# Altium PCB MainBoard.PcbDoc
Units mil, origin at the board's own origin, x right, y up, seen from the top; angles counter-clockwise.
Board outline 3600 x 2800 mil, 2 copper layers (Top Layer, Bottom Layer); 66 components, 52 nets, 264 pads, 84 vias.
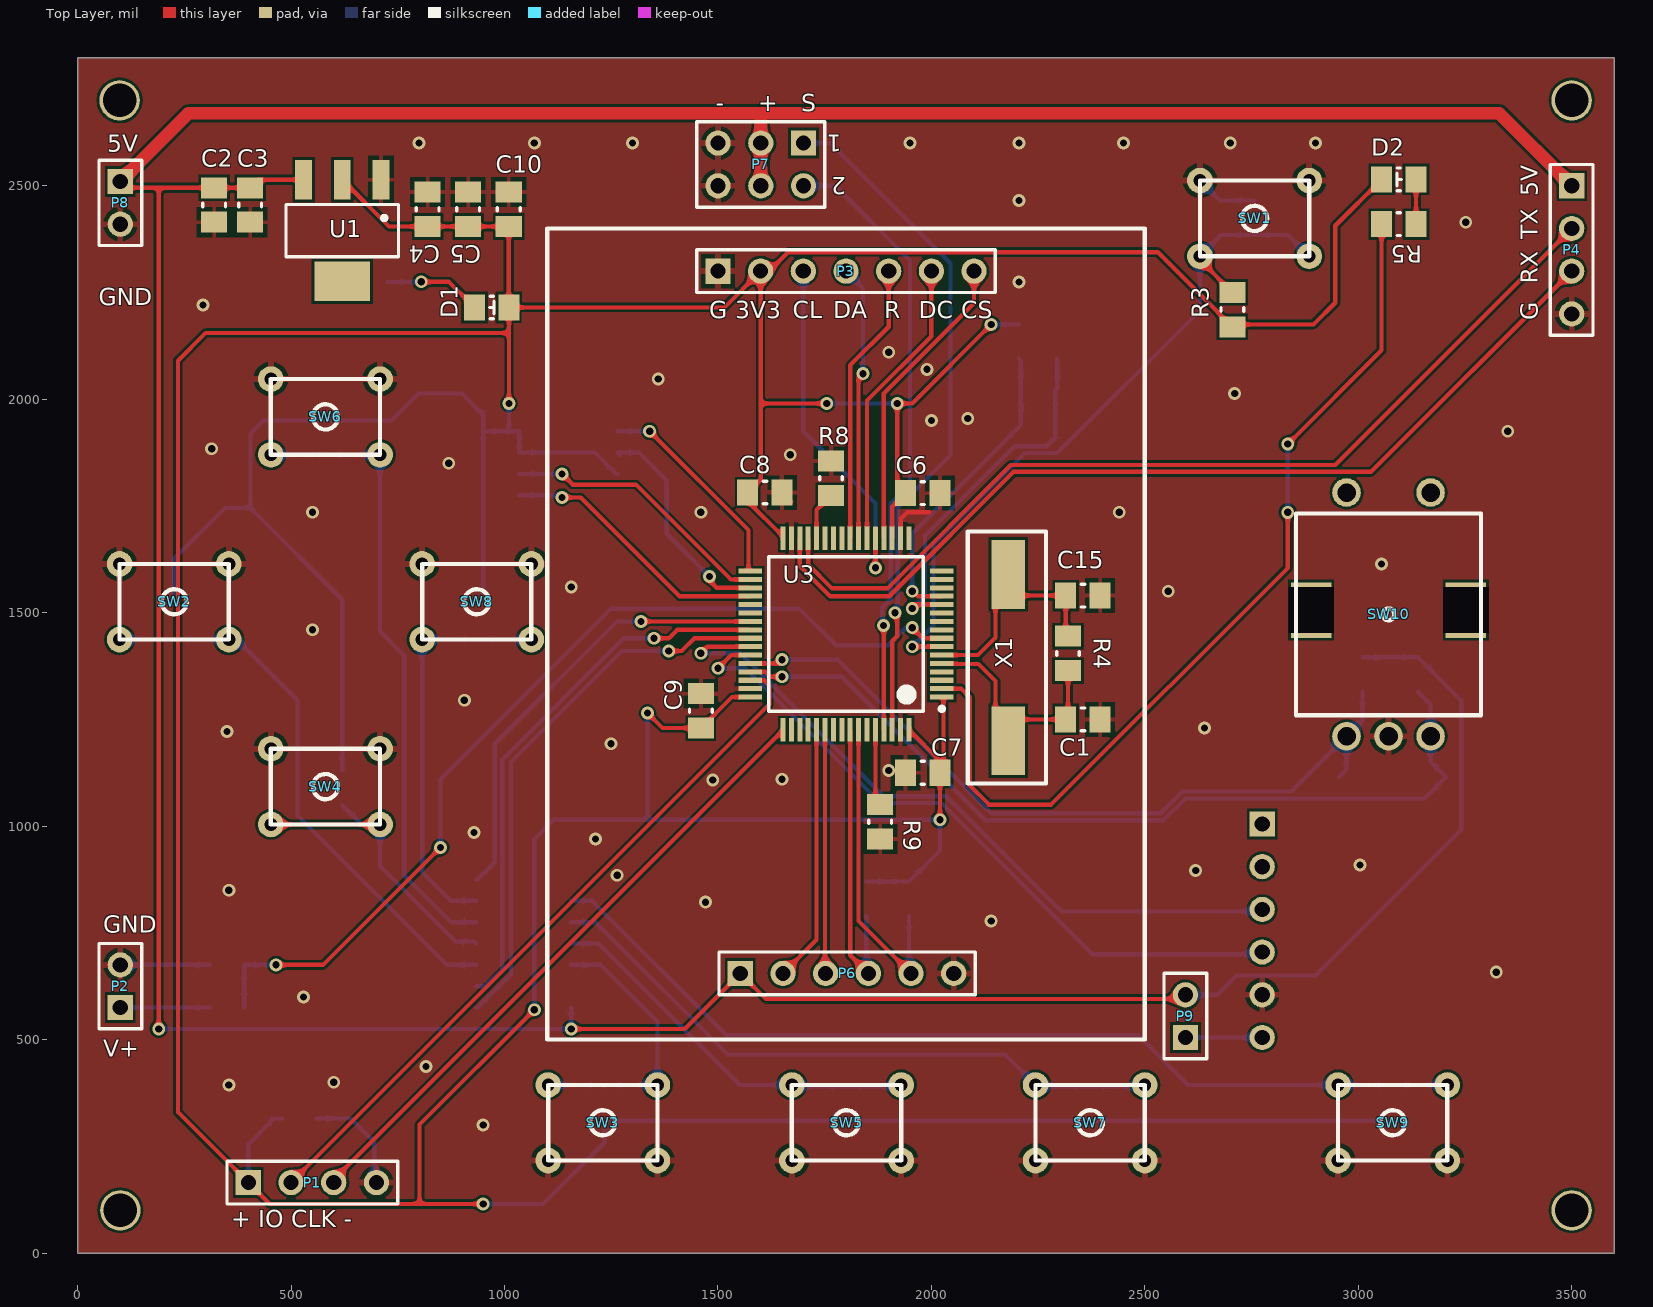
[diagram p0: Top Layer view]
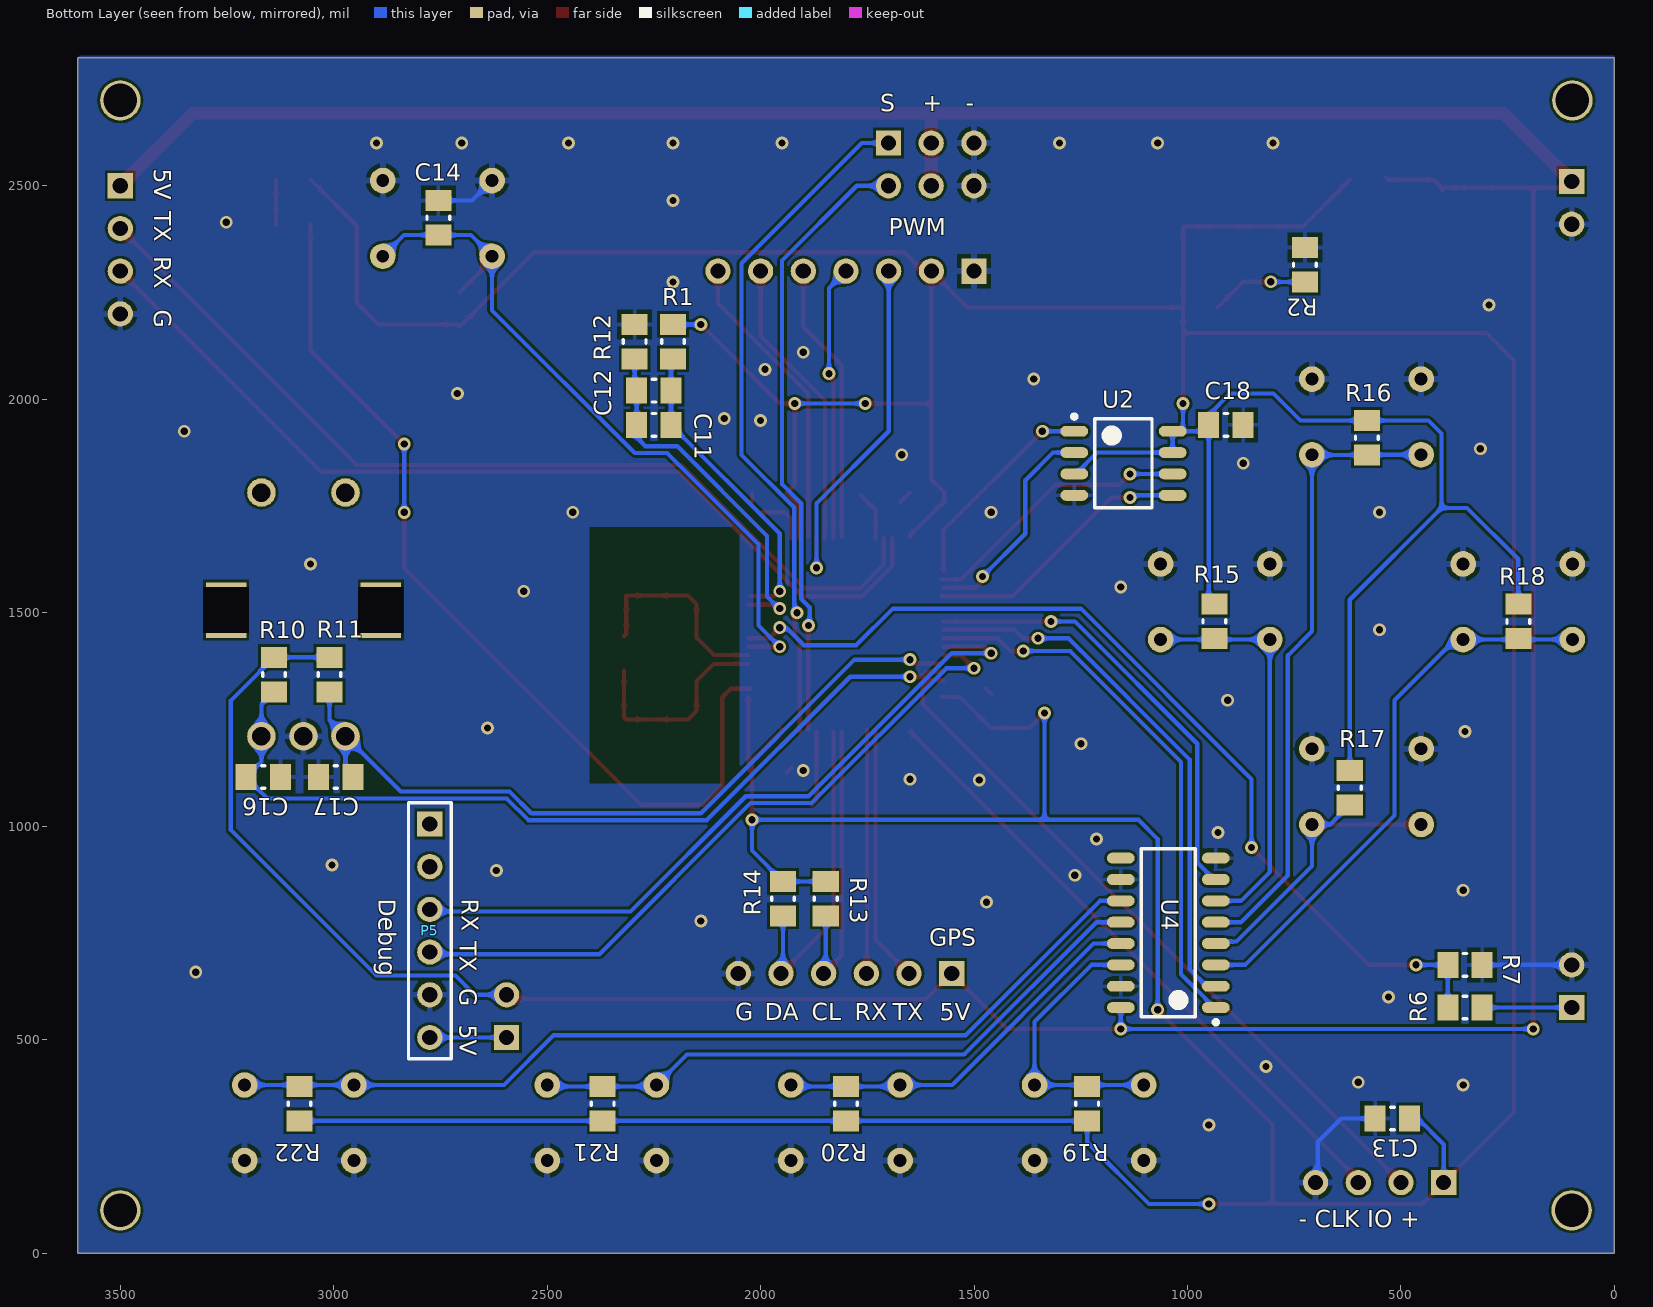
[diagram p1: Bottom Layer view, seen from below]

## Layer stack, top to bottom
Top Solder: solder mask 0.4, Solder Resist, Dk 3.5
Top Layer: signal copper 1.4
Dielectric 1: dielectric 12.6, FR-4, Dk 4.8
Bottom Layer: signal copper 1.4
Bottom Solder: solder mask 0.4, Solder Resist, Dk 3.5

## Board outline
0,0 0,2800 3600,2800 3600,0

## Design rules (kind name [scope] priority, off if disabled: settings)
Clearance [All] p1: gap=6 ignorepadtopadclearanceinfootprint=TRUE except(0: Arc-Hole Track-Hole SMDPad-Hole THPad-Hole Via-Hole Fill-Hole Poly-Hole Region-Hole Text-Hole; 10: Arc-THPad Arc-Via Arc-Text Track-THPad Track-Via Track-Text SMDPad-THPad SMDPad-Via SMDPad-Text THPad-THPad THPad-Via THPad-Text Via-Via Via-Text Fill-Text Poly-Text Region-Text Text-Text)
PolygonConnect [All] p1: thpad.connectstyle=Relief thpad.reliefconductorwidth=15 thpad.reliefentries=4 thpad.polygonreliefangle="90 Angle" thpad.airgapwidth=10 smdpad.connectstyle=Relief smdpad.reliefconductorwidth=10 smdpad.reliefentries=4 smdpad.polygonreliefangle="90 Angle" smdpad.airgapwidth=10 via.connectstyle=Direct via.reliefconductorwidth=10 via.reliefentries=4 via.polygonreliefangle="90 Angle" via.airgapwidth=10
RoutingVias [All] p1: holewidth=17 width=30 viastyle="Through Hole" minholewidth=17 minwidth=30 maxholewidth=28 maxwidth=50
SolderMaskExpansion [All] p1: expansion=4
Width [All] p1: maxlimit=30 minlimit=10 preferedwidth=10 minimp=50.000000 maximp=50.000000 favimp=50.000000
30 further rules are at their usual default settings.

## Components (designator, comment, footprint, x,y, rotation, side; value= is the part's Value field where it differs from the comment)
C1 "22p" 0805 2355,1250 r0 top
C2 "106" 0805 320,2455 r90 top
C3 "104" 0805 404.33,2455 r90 top
C4 "104" 0805 820,2445 r270 top
C5 "106" 0805 915,2445 r270 top
C6 "104" 0805 1980,1780 r180 top
C7 "104" 0805 1980,1125 r0 top
C8 "104" 0805 1610,1781.5 r180 top
C9 "104" 0805 1460,1270 r270 top
C10 "104" 0805 1010,2445 r270 top
C11 "104" 0805 2250,1940 r180 bottom
C12 "106" 0805 2250,2020 r180 bottom
C13 "104" 0805 520,315 r180 bottom
C14 "105" 0805 2755,2425 r270 bottom
C15 "22p" 0805 2355,1540 r0 top
C16 "104" 0805 3165,1115 r0 bottom
C17 "104" 0805 2995,1115 r0 bottom
C18 "104" 0805 910,1940 r180 bottom
D1 "LED" 0805 970,2215 r180 top
D2 "LED" 0805 3095,2515 r0 top
P1 "SWD" HDR1X4 400,165 r0 top
P2 "BAT Power" HDR1X2 100,575 r90 top
P3 "OLED" HDR1X7 1500,2300 r0 top
P4 "Telem" HDR1X4 3500,2500 r270 top
P5 "Debug" HDR1X6 2775,1005 r270 bottom
P6 "GPS" HDR1X6 1552.36,655 r0 top
P7 "PWM" HDR2X3 1700.35,2600 r180 top
P8 "Header 2" HDR1X2 100,2510 r270 top
P9 "Header 2" HDR1X2 2595,505 r90 top
R1 "0R" 0805 2205.35,2135 r90 bottom
R2 "510" 0805 725,2315 r90 bottom
R3 "10k" 0805 2705,2210 r90 top
R4 "1M" 0805 2320,1404.65 r270 top
R5 "510" 0805 3095,2410 r180 top
R6 "5k1" 0805 350,575 r180 bottom
R7 "1k" 0805 350,675 r0 bottom
R8 "10k" 0805 1765,1815 r270 top
R9 "10k" 0805 1880,1010 r270 top
R10 "10k" 0805 3140,1355 r90 bottom
R11 "10k" 0805 3010,1355 r270 bottom
R12 "0R" 0805 2295,2135 r90 bottom
R13 "2k2" 0805 1847.42,830 r270 bottom
R14 "2k2" 0805 1947.64,830 r270 bottom
R15 "10k" 0805 937.12,1480 r90 bottom
R16 "10k" 0805 580,1910 r90 bottom
R17 "10k" 0805 620,1090 r90 bottom
R18 "10k" 0805 225,1479.53 r90 bottom
R19 "10k" 0805 1235,350 r270 bottom
R20 "10k" 0805 1800,350 r270 bottom
R21 "10k" 0805 2370,350 r270 bottom
R22 "10k" 0805 3080,350 r270 bottom
SW1 "" Btn 2885,2335 r180 top
SW2 "" Btn 98.43,1614.17 r0 top
SW3 "" Btn 1102.36,393.7 r0 top
SW4 "" Btn 452.76,1181.1 r0 top
SW5 "" Btn 1673.23,393.7 r0 top
SW6 "" Btn 452.76,2047.24 r0 top
SW7 "" Btn 2244.09,393.7 r0 top
SW8 "" Btn 807.09,1614.17 r0 top
SW9 "" Btn 2952.76,393.7 r0 top
SW10 "EC11" EC11 2972.44,1781.5 r0 top
U1 "AMS1117-3.3" SOT223 620,2395 r270 top
U2 "MB85RS16" SOP8 1150,1850 r180 bottom
U3 "STM32F103R" LQFP64-M 1800,1450 r180 top
U4 "74LS165" SOP16 1045,750 r0 bottom
X1 "8M" 49SMD 2180,1395 r270 top

## Footprints (in the part's own frame and the unit in brackets; to place one, negate y for a bottom-side part, rotate by r counter-clockwise, add the part's x,y. Pads: shape width x height; smd on the part's side, far side on the other; paste and mask are expansions set on the pad)
49SMD [mm] "Chip Capacitor, 2-Leads, Body 12.65x4.50mm, IPC High Density"
  rect 4.1x2 smd: 1(-4.95,0) 2(4.95,0)
  silkscreen extent -7.5,-2.4 7.5,2.25
0805 [mm]
  rect 1.25x1.55 smd: 1(-1.025,0) 2(1.025,0)
  silkscreen extent -0.1,-0.67 0.1,0.67
Btn [mil]
  round 60 hole 30: 1(0,0) 1(255.91,0) 2(0,-177.17) 2(255.91,-177.17)
  silkscreen extent 0,-177 256,0
EC11 [mm]
  round 1.7 hole 1.1: 1(5,0) 2(0,0) 3(0,-14.5) 4(2.5,-14.5) 5(5,-14.5)
  rect 2.4x3.3 hole 2.7 square: ""(-2.1,-7) ""(7.1,-7)
  silkscreen extent -3,-13.25 8,-1.25
HDR1X2 [mm] "Connector; Header; 2 Position"
  rect 1.5x1.5 hole 0.9: 1(0,0)
  round 1.5 hole 0.9: 2(2.54,0)
  silkscreen extent -1.27,-1.27 3.81,1.27
HDR1X4 [mm] "Connector; Header; 4 Position"
  rect 1.5x1.5 hole 0.9: 1(0,0)
  round 1.5 hole 0.9: 2(2.54,0) 3(5.08,0) 4(7.62,0)
  silkscreen extent -1.27,-1.27 8.89,1.27
HDR1X6 [mm] "Connector; Header; 6 Position"
  rect 1.5x1.5 hole 0.9: 1(0,0)
  round 1.5 hole 0.9: 2(2.54,0) 3(5.08,0) 4(7.62,0) 5(10.16,0) 6(12.7,0)
  silkscreen extent -1.27,-1.27 13.97,1.27
HDR1X7 [mm] "Connector; Header; 7 Position"
  rect 1.5x1.5 hole 0.9: 1(0,0)
  round 1.5 hole 0.9: 2(2.54,0) 3(5.08,0) 4(7.62,0) 5(10.16,0) 6(12.7,0) 7(15.24,0)
  silkscreen extent -1.27,-1.27 16.51,1.27
HDR2X3 [mm] "Connector; Header; 3x2 Position"
  rect 1.5x1.5 hole 0.9: 1(0,0)
  round 1.5 hole 0.9: 2(0,2.54) 3(2.54,0) 4(2.54,2.54) 5(5.08,0) 6(5.08,2.54)
  silkscreen extent -1.27,-1.27 6.35,3.81
LQFP64-M [mm] "TSQFP, 64-Leads, Body 10.00x10.00mm, Pitch 0.50mm, IPC Medium Density"
  rect 1.4x0.3 smd: 1(-5.7,3.75) 2(-5.7,3.25) 3(-5.7,2.75) 4(-5.7,2.25) 5(-5.7,1.75) 6(-5.7,1.25) 7(-5.7,0.75) 8(-5.7,0.25) 9(-5.7,-0.25) 10(-5.7,-0.75) 11(-5.7,-1.25) 12(-5.7,-1.75) 13(-5.7,-2.25) 14(-5.7,-2.75) 15(-5.7,-3.25) 16(-5.7,-3.75) 33(5.7,-3.75) 34(5.7,-3.25) 35(5.7,-2.75) 36(5.7,-2.25) 37(5.7,-1.75) 38(5.7,-1.25) 39(5.7,-0.75) 40(5.7,-0.25) 41(5.7,0.25) 42(5.7,0.75) 43(5.7,1.25) 44(5.7,1.75) 45(5.7,2.25) 46(5.7,2.75) 47(5.7,3.25) 48(5.7,3.75)
  rect 0.3x1.4 smd: 17(-3.75,-5.7) 18(-3.25,-5.7) 19(-2.75,-5.7) 20(-2.25,-5.7) 21(-1.75,-5.7) 22(-1.25,-5.7) 23(-0.75,-5.7) 24(-0.25,-5.7) 25(0.25,-5.7) 26(0.75,-5.7) 27(1.25,-5.7) 28(1.75,-5.7) 29(2.25,-5.7) 30(2.75,-5.7) 31(3.25,-5.7) 32(3.75,-5.7) 49(3.75,5.7) 50(3.25,5.7) 51(2.75,5.7) 52(2.25,5.7) 53(1.75,5.7) 54(1.25,5.7) 55(0.75,5.7) 56(0.25,5.7) 57(-0.25,5.7) 58(-0.75,5.7) 59(-1.25,5.7) 60(-1.75,5.7) 61(-2.25,5.7) 62(-2.75,5.7) 63(-3.25,5.7) 64(-3.75,5.7)
  silkscreen extent -5.82,-4.6 4.6,4.6
SOP8 [mm]
  oval 1.65x0.65 smd: 1(-2.925,1.905) 2(-2.925,0.635) 3(-2.925,-0.635) 4(-2.925,-1.905) 5(2.925,-1.905) 6(2.925,-0.635) 7(2.925,0.635) 8(2.925,1.905)
  silkscreen extent -3.05,-2.65 1.7,2.9
SOP16 [mm] "SOP, 16-Leads, Body 9.90x3.91mm, Pitch 1.27mm, IPC Low Density"
  oval 1.65x0.65 smd: 1(-2.825,4.445) 2(-2.825,3.175) 3(-2.825,1.905) 4(-2.825,0.635) 5(-2.825,-0.635) 6(-2.825,-1.905) 7(-2.825,-3.175) 8(-2.825,-4.445) 9(2.825,-4.445) 10(2.825,-3.175) 11(2.825,-1.905) 12(2.825,-0.635) 13(2.825,0.635) 14(2.825,1.905) 15(2.825,3.175) 16(2.825,4.445)
  silkscreen extent -2.95,-5 1.6,5.44
SOT223 [mm] "SOT223, 4-Leads, Body 6.50x7.00mm (avg), Pitch 2.30mm, IPC Low Density"
  rect 2.35x1 smd: 1(-3.025,2.3) 2(-3.025,0) 3(-3.025,-2.3)
  rect 2.35x3.3 smd: 4(3.025,0)
  silkscreen extent -1.55,-3.35 1.55,3.35

## Part data
C1 C2 C3 C4 C5 C6 C7 C8 C9 C10 C11 C12 C13 C14 C15 C16 C17 C18: library part Cap
P1 P4: library part "Header 4", "Header, 4-Pin", LatestRevisionDate=17-Jul-2002, LatestRevisionNote="Re-released for DXP Platform.", Publisher="Altium Limited"
P2: library part "Header 2", "Header, 2-Pin", LatestRevisionDate=17-Jul-2002, LatestRevisionNote="Re-released for DXP Platform.", Publisher="Altium Limited"
P3: library part "Header 7", "Header, 7-Pin", LatestRevisionDate=17-Jul-2002, LatestRevisionNote="Re-released for DXP Platform.", Publisher="Altium Limited"
P5 P6: library part "Header 6", "Header, 6-Pin", LatestRevisionDate=17-Jul-2002, LatestRevisionNote="Re-released for DXP Platform.", Publisher="Altium Limited"
P7: library part "Header 3X2", "Header, 3-Pin, Dual row", LatestRevisionDate=17-Jul-2002, LatestRevisionNote="Re-released for DXP Platform.", Publisher="Altium Limited"
P8 P9: "Header, 2-Pin", LatestRevisionDate=17-Jul-2002, LatestRevisionNote="Re-released for DXP Platform.", Publisher="Altium Limited"
R1 R2 R3 R4 R5 R6 R7 R8 R9 R10 R11 R12 R13 R14 R15 R16 R17 R18 R19 R20 R21 R22: library part Res
SW1 SW2 SW3 SW4 SW5 SW6 SW7 SW8 SW9: library part Btn
X1: library part XTAL

## Free pads (board coordinates)
  round 94.49 hole 78.74: ""(98.43,2700) ""(100,100) ""(3500,100) ""(3500,2700)

## Via types
v1: diameter 30, hole 17, Top Layer to Bottom Layer, 84 vias

## Nets (pads, with @x,y where several pads share a name; then routed paths per layer and width w, separated by ;. In a path a pad name is that pad's centre, name@x,y a point inside that pad or via, vN(x,y) a via of type N, cw(c..) or ccw(c..) an arc to the next point about the centre after c; other vN are vias at no path point)
3V3: C4.2 C5.2 C6.2 C7.2 C8.2 C9.2 C10.2 C13.2 C18.1 D1.1 D2.1 P1.1 P3.2 R1.2 R3.1 R13.1 R14.1 R15.2 R16.2 R17.2 R18.2 R19.2 R20.2 R21.2 R22.2 U1.2 U2.3 U2.7 U2.8 U3.1 U3.19 U3.32 U3.48 U3.64 | length 16642.1
  Top Layer w10: U1.2 729.45,2404.65 C4.2 C5.2 C10.2 1010,2215.35 D1.1 ; v1(950,115) 801,115 ; v1(1010.35,1990) 1010.35,2155 ; v1(1070,570) 801,301 801,115 ; v1(1335,1265) 1370.35,1229.65 C9.2 1532.72,1302.36 U3.48 ; U3.32@1652.36,1678.35 1569.65,1761.06 C8.2 1600,1811.85 1600,1990 ; v1(1755,1990) 1600,1990 ; U3.19 1908.27,1748.62 C6.2 1920,1799.65 v1(1920,1990) 1955,1990 v1(2140,2175) ; U3.64 2020.35,1152.87 C7.2 ; v1(2020,1015) 2020,1124.65 C7.2 ; U3.1@2028.35,1302.36 2028.35,1132.99 C7.2 ; D2.1 2946,2406.35 2946,2226 2895,2175 2710.35,2175 R3.1 2530.12,2344.53 1664.91,2344.53 1620.38,2300 P3.2 ; 801,115 450,115 P1.1 235,330 235,2090 300,2155 1010.35,2155 ; 1010.35,2155 D1.1 ; D1.1 1515,2215 P3.2 ; 1600,1990 P3.2
  Bottom Layer w10: R18.2 225,1625 345.35,1745.35 405,1745.35 ; P1.1 400,255 460,315 C13.2 ; R17.2 620,1530.35 405,1745.35 ; R15.2 950.35,1533.59 C18.1@950.35,1926 ; v1(950,115) 1090.35,115 1235,259.65 R19.2 R20.2 R21.2 R22.2 ; v1(1010.35,1990) U2.8@1010.35,1925 ; v1(1070,570) 1070,970 1115,1015 1335,1015 ; U2.3 1261.82,1825 1211.82,1875 U2.7 U2.8 U2.8@1010.35,1925 ; v1(1335,1265) 1335,1015 ; v1(1755,1990) v1(1920,1990) ; R13.1 R14.1 2020,942.72 v1(2020,1015) 1335,1015 ; v1(2140,2175) 2205,2175 R1.2 ; 405,1745.35 405,1920 435.35,1950.35 R16.2 735.35,1950.35 798.58,2013.58 900.2,2013.58 950.35,1963.43 C18.1 C18.1@950.35,1926 ; C18.1@950.35,1926 951.35,1925 U2.8@1010.35,1925
5V: C2.2 C3.2 P4.1 P6.1 P7.3 P7.4 P8.1 P9.2 R10.2 R11.1 U1.3 U4.16 | length 10051.8
  Top Layer w10: P8.1 114.65,2495.35 190,2495.35 ; v1(190,525) 190,2495.35 ; C3.2@403.27,2489.29 404.33,2490.35 399.33,2495.35 C2.2 190,2495.35 ; C3.2 423.07,2514.09 U1.3 U1.3@535,2519.65 ; v1(1156.22,525) 1422.36,525 P6.1 1612.36,595 2585,595 P9.2 ; 1600,2670 1600.35,2669.65
  Top Layer w30: P8.1 260,2670 1600,2670 3330,2670 P4.1 ; P7.4 P7.3 1600.35,2669.65
  Bottom Layer w10: v1(190,525) v1(1156.22,525) U4.16 ; P9.2 2670,605 2715,650 2900,650 3240.96,990.96 3240.96,1294.39 R10.2 R11.1
ADC10: R6.1 R7.2 U3.8 | length 2240.5
  Top Layer w10: v1(465,675) 575,675 v1(850,950) ; v1(1955,1465) 1979.84,1440.16 U3.8@2028.35,1440.16
  Bottom Layer w10: R6.1 R7.2 v1(465,675) ; v1(850,950) 850,1110 1249.53,1509.53 1689.53,1509.53 1690,1510 1776,1424 1899,1424 1940,1465 v1(1955,1465)
GND: C1.2 C2.1 C3.1 C4.1 C5.1 C6.1 C7.1 C8.1 C9.1 C10.1 C13.1 C14.1 C15.2 C16.1 C17.2 C18.2 P1.4 P2.2 P3.1 P4.4 P5.5 P6.6 P7.5 P7.6 P8.2 R2.2 R7.1 R8.1 R9.2 R12.2 SW1.2 SW2.1 SW3.2 SW4.1 SW5.2 SW6.1 SW7.2 SW8.1 SW9.2 SW10.4 U1.1 U2.4 U3.18 U3.31 U3.47 U3.63 U4.8 U4.10 U4.15 | length 811.6
  Top Layer w10: C9.1 C9.1@1471.69,1322.05 ; C8.1 C8.1@1672.05,1759.8 ; C7.1@1927.95,1136.69 C7.1 ; U3.18 1927.95,1719.77 1943.19,1735 1995,1735 ; C6.1@2020.35,1760.35 C6.1
  Bottom Layer w10: P2.2 R7.1 ; C13.1 640,315 695,260 695,170 P1.4 ; SW1.2@2629.09,2512.17 2675.91,2465.35 C14.1
  other v1: 950,300 354.33,393.7 600,400 816,437 529.45,600 3323,658 2140,778 1471,822 354.33,850 1263.9,885 2619,896 3004,909 1213.27,970 928.78,985 1488,1108 1650,1110 1900,1130.35 1249.53,1192.89 350,1221.65 2640,1230 906,1295 550,1459.84 2555,1550 1156.22,1560.35 3054.65,1614.17 550,1735.23 1460,1735.23 2440,1735.23 869.65,1850 1669.53,1870.08 314,1884 3350,1925 2000,1950 2085,1955 2710.35,2013.58 1360,2047.24 1990,2070 1900,2110 294,2221 2205,2274.65 3251.97,2414.65 2205.35,2465.35 800,2600 1070,2600 1300,2600 1950,2600 2205,2600 2450,2600 2700,2600 2900,2600
NetD1_2: D1.2 R2.1 | length 229.6
  Top Layer w10: v1(805,2275) 869.65,2275 D1.2
  Bottom Layer w10: R2.1 804.65,2274.65 v1(805,2275)
NetD2_2: D2.2 R5.1 | length 105
  Top Layer w10: R5.1 D2.2
NetP2_1: P2.1 R6.2 | length 209.6
  Bottom Layer w10: P2.1 R6.2
NetP5_6: P5.6 P9.1 | length 180
  Bottom Layer w10: P9.1 P5.6
NetR8_2: R8.2 U3.28 | length 114.3
  Top Layer w10: U3.28 1731.1,1740.75 R8.2
NetR9_1: R9.1 U3.60 | length 175.9
  Top Layer w10: U3.60@1868.9,1221.65 1868.9,1061.46 R9.1
NetR15_1: R15.1 SW8.2 U4.6 | length 954.8
  Bottom Layer w10: U4.6 875,825 807.09,892.91 807.09,1437.01 SW8.2@1062.99,1437.01
NetR16_1: R16.1 SW6.2 U4.5 | length 1479
  Bottom Layer w10: SW6.2@452.76,1870.08 579.57,1870.08 R16.1 708.23,1869.65 708.66,1870.08 708.66,1456.34 765,1400 765,885 875,775 U4.5
NetR17_1: R17.1 SW4.2 U4.4 | length 761.3
  Top Layer w10: SW4.2@452.76,1003.94 SW4.2@708.66,1003.94
  Bottom Layer w10: R17.1 665.71,1003.94 708.66,1003.94 708.66,906.34 885,730 928.78,730 U4.4
NetR18_1: R18.1 SW2.2 U4.3 | length 1314
  Bottom Layer w10: SW2.2@100.59,1439.17 98.43,1437.01 222.83,1437.01 R18.1 227.17,1437.01 354.33,1437.01 372.99,1437.01 515,1295 515,1025 865,675 U4.3
NetR19_1: R19.1 SW3.1 U4.14 | length 664
  Bottom Layer w10: SW3.1@1102.36,393.7 1231.65,393.7 R19.1 1238.35,393.7 1358.27,393.7 1358.27,541.73 1225,675 U4.14
NetR20_1: R20.1 SW5.1 U4.13 | length 912.9
  Bottom Layer w10: U4.13 1220,725 1551.3,393.7 1673.23,393.7 1676.57,390.35 R20.1 1925.79,390.35 SW5.1@1929.13,393.7
NetR21_1: R21.1 SW7.1 U4.12 | length 1504.5
  Bottom Layer w10: U4.12 1213.27,775 1523.27,465 2172.79,465 2244.09,393.7 2247.44,390.35 R21.1 2496.65,390.35 SW7.1@2500,393.7
NetR22_1: R22.1 SW9.1 U4.11 | length 2231.1
  Bottom Layer w10: U4.11 1205,825 1520,510 2485,510 2601.3,393.7 2952.76,393.7 SW9.1@3208.66,393.7
NRST: C14.2 R3.2 SW1.1 U3.7 | length 1725.4
  Top Layer w10: v1(1955,1420) 1955.47,1420.47 U3.7@2028.35,1420.47 ; SW1.1@2629.09,2335 2629.09,2326.26 R3.2
  Bottom Layer w10: v1(1955,1420) 2005,1470 2005,1660 2219,1874 2295.03,1874 2629.09,2208.07 2629.09,2335 2678.74,2384.65 C14.2 2835.35,2384.65 SW1.1@2885,2335
OSCIN: C1.1 R4.2 U3.5 X1.2 | length 498.1
  Top Layer w10: U3.5@2028.35,1381.1 2029.45,1380 2110,1380 2150,1340 2150,1270 2170,1250 C1.1 2320,1255.35 R4.2
OSCOUT: C15.1 R4.1 U3.6 X1.1 | length 487.1
  Top Layer w10: U3.6@2028.35,1400.79 2109.21,1400.79 2150,1441.58 2150,1520 2170,1540 C15.1 2314.65,1450.35 R4.1
PA8: U3.41 U4.1 | length 1287.4
  Top Layer w10: v1(1385,1410) 1415,1410 1445.16,1440.16 U3.41@1571.65,1440.16
  Bottom Layer w10: U4.1 937.12,575 1015,652.88 1015,1150 1275,1410 v1(1385,1410)
PA11: C17.1 R11.2 SW10.3 U3.44 | length 1847
  Top Layer w10: U3.44 1641.1,1381.1 v1(1650,1390)
  Bottom Layer w10: v1(1650,1390) 1780,1390 2140,1030 2537.37,1030 2588.37,1081 2842.81,1081 SW10.3 ; C17.1 2972.44,1132.79 SW10.3 ; R11.2 3010,1248.19 SW10.3
PA12: C16.2 R10.1 SW10.5 U3.45 | length 2042.2
  Top Layer w10: U3.45 1611.21,1361.42 1622.63,1350 v1(1650,1350)
  Bottom Layer w10: v1(1650,1350) 1790,1350 2126,1014 2544,1014 2595,1065 3155.35,1065 C16.2 3169.29,1151.06 SW10.5 3169.29,1285.35 R10.1
PB5: P6.4 R13.2 U3.57 | length 721
  Top Layer w10: U3.57@1809.84,1221.65 1809.84,697.52 P6.4
  Bottom Layer w10: R13.2 1847.42,659.94 P6.4
PB6: P6.5 R14.2 U3.58 | length 754.1
  Top Layer w10: U3.58@1829.53,1221.65 1829.53,777.83 P6.5
  Bottom Layer w10: R14.2 1947.64,659.72 P6.5
PC4: P3.5 U3.24 | length 659
  Top Layer w10: U3.24@1809.84,1678.35 1809.84,2079.84 1900,2170 P3.5
PC6: U3.37
PC7: U3.38
PC8: U3.39 U4.7 | length 1051
  Top Layer w10: v1(1320,1479.53) U3.39@1571.65,1479.53
  Bottom Layer w10: U4.7 937.12,875 977.26,915.14 977.26,1192.89 1263.9,1479.53 v1(1320,1479.53)
PC9: U3.40 U4.2 | length 1271.4
  Top Layer w10: v1(1350,1440) 1385,1440 1405,1460 1482.43,1460 1482.58,1459.84 U3.40@1571.65,1459.84
  Bottom Layer w10: U4.2 955,625 995,665 995,1156 1279,1440 v1(1350,1440)
PC13: R5.2 U3.2 | length 2170
  Top Layer w10: U3.2 2069.77,1322.05 2090,1301.81 2090,1095 2134.65,1050.35 2280.35,1050.35 2835,1605 v1(2835,1735) ; v1(2835,1895) 3054.65,2114.65 R5.2
  Bottom Layer w10: v1(2835,1735) v1(2835,1895)
S1CLK: P3.3 U3.21 | length 838.3
  Top Layer w10: v1(1868.9,1605) U3.21@1868.9,1678.35
  Bottom Layer w10: P3.3 1700,1925 1868.9,1756.1 v1(1868.9,1605)
S1CS: P3.7 U3.20 | length 709.2
  Top Layer w10: U3.20@1888.58,1678.35 1888.58,2013.58 2100,2225 P3.7
S1MISO: P3.6 U3.22 | length 688
  Top Layer w10: U3.22 1849.21,1996.84 2000,2147.63 P3.6
S1MOSI: P3.4 U3.23 | length 646.5
  Top Layer w10: U3.23 1829.53,2049.53 v1(1840,2060)
  Bottom Layer w10: P3.4 1840,2260 v1(1840,2060)
S2CLK: U2.6 U3.34 | length 643.1
  Top Layer w10: v1(1135,1825) 1160,1800 1308.19,1800 1530.23,1577.95 U3.34
  Bottom Layer w10: U2.6 v1(1135,1825)
S2CS: U2.1 U3.33 | length 498.2
  Top Layer w10: v1(1340,1925) 1571.65,1693.35 U3.33@1571.65,1597.64
  Bottom Layer w10: U2.1 v1(1340,1925)
S2MISO: U2.2 U3.35 | length 533.7
  Top Layer w10: v1(1480,1585) 1480,1575 1496.73,1558.27 U3.35@1571.65,1558.27
  Bottom Layer w10: U2.2@1270.08,1870.08 U2.2 1315,1875 1380,1810 1380,1685 v1(1480,1585) v1@1470,1585
S2MOSI: U2.5 U3.36 | length 638.7
  Top Layer w10: v1(1135,1770) 1178.62,1770 1410.04,1538.58 U3.36
  Bottom Layer w10: U2.5 1130,1775 v1(1135,1770)
SWCLK: P1.3 U3.49 | length 1494.2
  Top Layer w10: P1.3 600,172.1 1649.55,1221.65 U3.49@1652.36,1221.65
SWDIO: P1.2 U3.46 | length 1682.1
  Top Layer w10: P1.2 1620,1285 1620,1330 1608.27,1341.73 U3.46@1571.65,1341.73
T4CH3: P7.2 U3.61 | length 1450
  Top Layer w10: v1(1888,1470) 1888.58,1469.42 U3.61
  Bottom Layer w10: P7.2 1775,2500 1950,2325 1950,1801.1 1905,1756.1 1905,1532.43 1885,1512.43 1885,1473 v1(1888,1470)
T4CH4: P7.1 U3.62 | length 1618.2
  Top Layer w10: U3.62@1908.27,1221.65 1908.27,1433.27 1920,1445 1920,1495 v1(1915,1500)
  Bottom Layer w10: P7.1 1762.97,2600 2044.53,2318.44 2044.53,1869.53 1921,1746 1921,1506 v1(1915,1500)
U1RX: P5.4 U3.43 | length 1638.3
  Top Layer w10: v1(1500.35,1370) 1531.14,1400.79 U3.43@1571.65,1400.79
  Bottom Layer w10: v1(1500.35,1370) 1564.95,1370 1880.95,1054 2023.43,1054 2377.43,700 2770,700 P5.4
U1TX: P5.3 U3.42 | length 1685.7
  Top Layer w10: v1(1460,1405) 1475.47,1420.47 U3.42@1571.65,1420.47
  Bottom Layer w10: v1(1460,1405) 1552.57,1405 1887.57,1070 2035,1070 2305,800 2770,800 P5.3
U3RX: P4.3 U3.30 | length 2217.8
  Top Layer w10: U3.30 1691.73,1609.69 1762.84,1538.58 1901.16,1538.58 2192.57,1830 3030,1830 P4.3
U3TX: P4.2 U3.29 | length 2222.6
  Top Layer w10: U3.29 1711.42,1612.63 1767.02,1557.02 1896.97,1557.02 2185.95,1846 2946,1846 P4.2
U5RX: P6.3 U3.54 | length 571.2
  Top Layer w10: U3.54 1750.79,656.57 P6.3
U5TX: P6.2 U3.53 | length 599.3
  Top Layer w10: P6.2 1731.1,733.74 U3.53@1731.1,1221.65
VDDA: C11.2 C12.2 R1.1 U3.13 | length 726
  Top Layer w10: v1(1955,1550) 1957.43,1550 1968.84,1538.58 U3.13
  Bottom Layer w10: v1(1955,1550) 1955,1685.35 C11.2 C12.2 2209.65,2090.35 R1.1
VSSA: C11.1 C12.1 R12.1 U3.12 | length 847.9
  Top Layer w10: v1(1955,1510) 1963.9,1518.9 U3.12@2028.35,1518.9
  Bottom Layer w10: v1(1955,1510) 1957.43,1510 1985,1537.57 1985,1680 2195,1890 2270,1890 2290.35,1910.35 C11.1 C12.1 2295,2024.65 R12.1
pads on no net: P5.1 P5.2 SW10. SW10.1 SW10.2 U1.4 U3.3 U3.4 U3.9 U3.10 U3.11 U3.14 U3.15 U3.16 U3.17 U3.25 U3.26 U3.27 U3.50 U3.51 U3.52 U3.55 U3.56 U3.59 U4.9

## Polygon pours and split planes (outlines as drawn)
GND on Bottom Layer "Bottom Layer-GND" (solid, remove dead copper, pour order 16): 0,2805 3595,2805 3600,2800 3600,0 0,0
no net on Bottom Layer "Bottom Layer-No Net" (solid, remove dead copper, pour order 10): 0,2805
GND on Top Layer "Top Layer-GND" (solid, remove dead copper, pour order 12): 0,2800 3600,2800 3600,0 0,0

## Other copper
Bottom Layer:
  pour cut-out: 2050,1700 2400,1700 2400,1100 2050,1100

## Silkscreen, mask and mechanical layers (free items; w line width, h text height)
Top Overlay:
  lines w7: 965,2215 973.94,2215 ; 975,2200 975,2230 ; 3091.06,2500 3091.06,2530 ; 3092.13,2515 3101.06,2515
  lines w10: 1100,500 1100,2400 2500,2400 2500,500 1100,500
  text "-" at 1495,2675 h40
  text "+" at 1595,2675 h40
  text "S" at 1695,2675 h40
  text "5V" at 70,2580 h40
  text "5V" at 3420,2475 h40 r90
  text "TX" at 3420,2375 h40 r90
  text "RX" at 3420,2270 h40 r90
  text "GND" at 50,2220.35 h40
  text "G" at 1480,2190 h40
  text "3V3" at 1540,2190 h40
  text "CL" at 1675,2190 h40
  text "DA" at 1770,2190 h40
  text "R" at 1890,2190 h40
  text "DC" at 1970,2190 h40
  text "CS" at 2070,2190 h40
  text "G" at 3420,2185 h40 r90
  text "GND" at 60,750 h40
  text "V+" at 60,460 h40
  text "+ IO CLK -" at 360,60 h40
Bottom Overlay:
  text "-" at 1520,2675 h40
  text "+" at 1620,2675 h40
  text "S" at 1720,2675 h40
  text "5V" at 3420,2540 h40 r90
  text "TX" at 3420,2440 h40 r90
  text "RX" at 3420,2335 h40 r90
  text "G" at 3420,2210 h40 r90
  text "RX" at 2700,830 h40 r90
  text "TX" at 2705,730 h40 r90
  text "G" at 2705,620 h40 r90
  text "5V" at 1580,545 h40
  text "TX" at 1690,545 h40
  text "RX" at 1780,545 h40
  text "CL" at 1880,545 h40
  text "DA" at 1990,545 h40
  text "G" at 2060,545 h40
  text "5V" at 2705,535 h40 r90
  text "- CLK IO +" at 740,60 h40
Mechanical 1:
  the board outline again, w10

## Text inside footprints (layer, text, board x,y; h text height)
P7: Top Overlay "1" at 1790,2620 h40 r180; Top Overlay "2" at 1800.35,2520 h40 r180